# EAGLE board RimBoxPowerSupply (EAGLE 4.13)
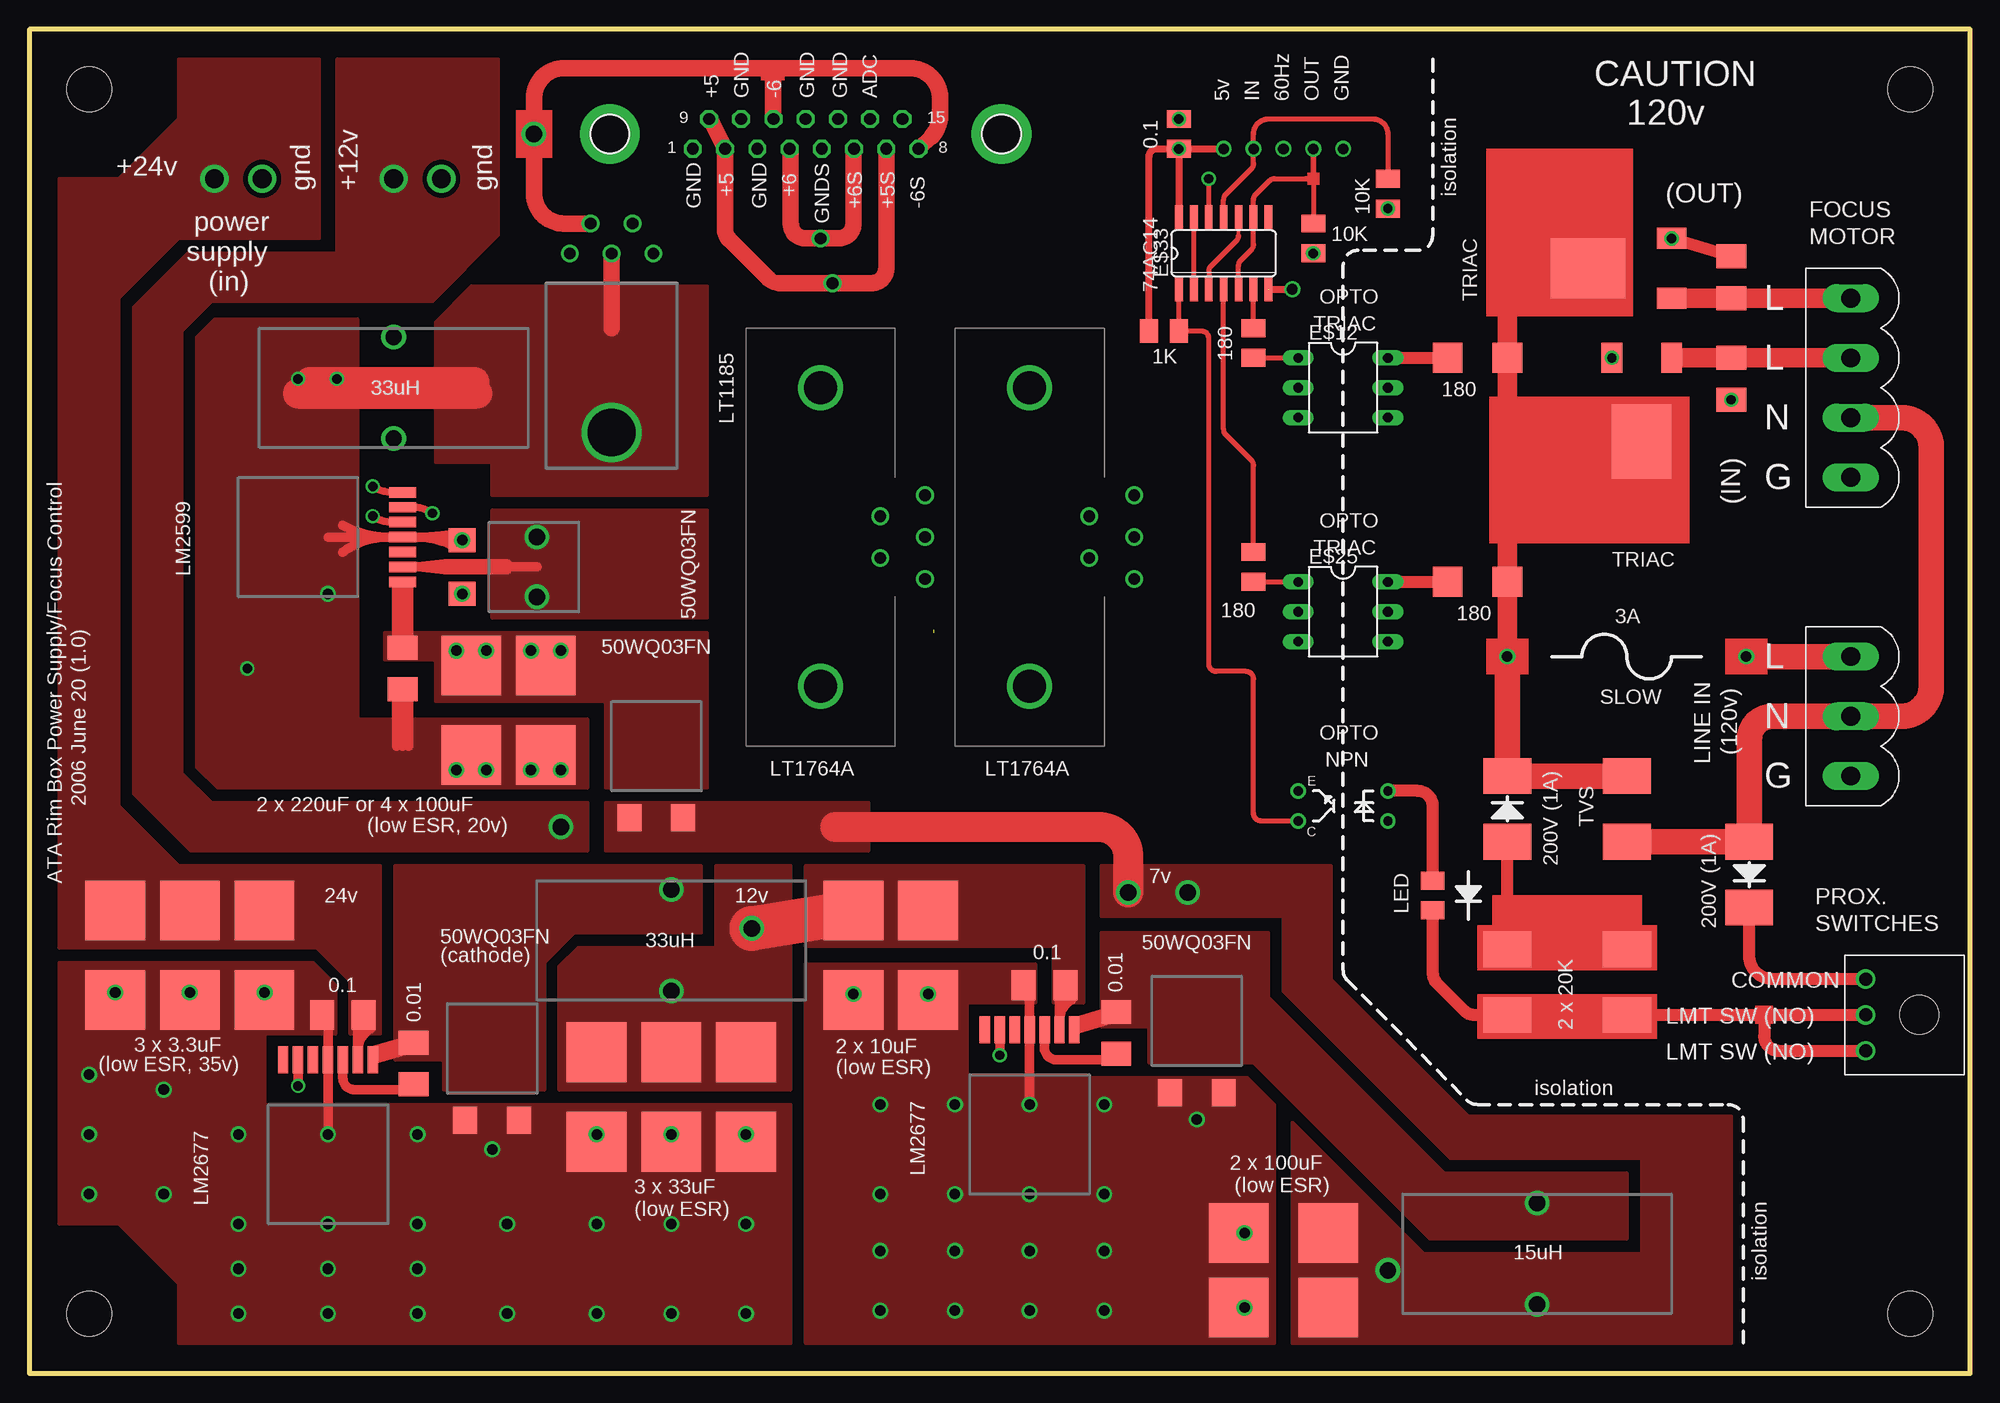
[diagram p0: board, top side]
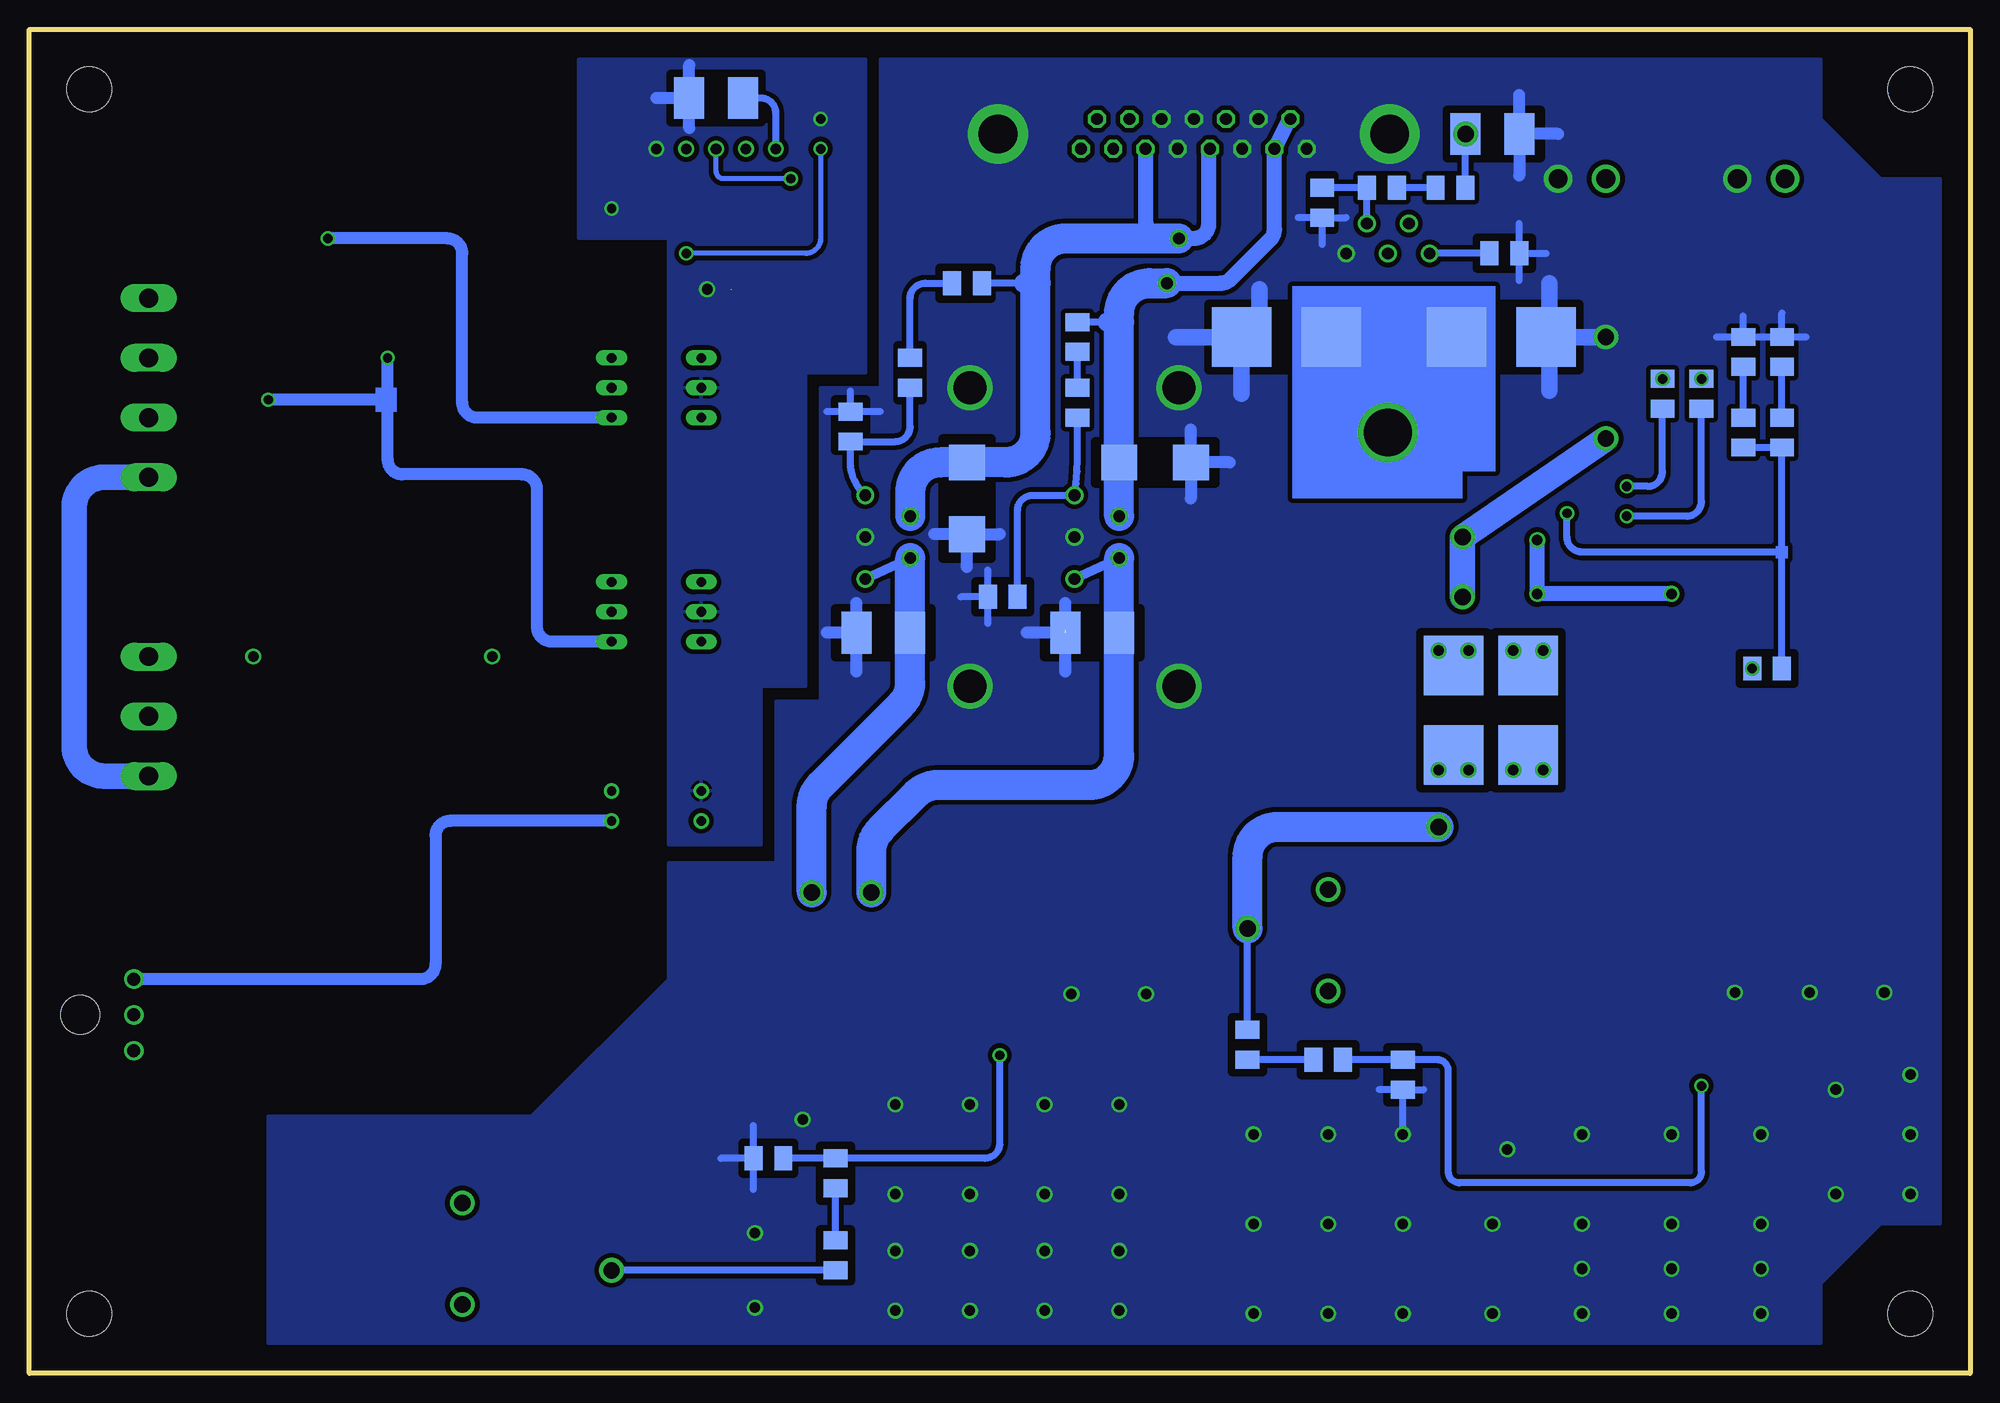
[diagram p1: board, bottom side, seen from below]

Size 165.1 x 114.3 mm. Coordinates in mm from the lower left corner, seen from the top.
Outline: 0,0 165.1,0 165.1,114.3 0,114.3 0,0
Copper layers (1*16): Top 0.035mm / dielectric 1.5mm / Bottom 0.035mm
Design rules "default": minimum track width 10mil, minimum drill 24mil, track to track 8mil, track to pad 8mil, pad to pad 8mil, via to via 8mil, smd to smd 8mil, copper to edge 40mil, drill to drill 8mil, minimum pad ring 10mil, minimum via ring 8mil, stop-mask expansion 4mil, vias tented up to drill 0mil, thermal gap 10mil
Holes 3.81 mm at 160.02,109.22 160.02,5.08 5.08,5.08 5.08,109.22
bRestrict: area 60.5,27.4 to 62.5,28.4; area 47,23.1 to 49.5,27.7; area 52.3,25.4 to 56.9,27.9; area 60.2,25.7 to 62.7,30.2; area 95.2,14.7 to 97.8,19.3; area 100.1,17 to 104.4,19.6; area 95.2,7.9 to 97.8,12.2; area 102.9,106.4 to 110.5,110.5; area 70.6,61 to 78.7,65; area 88.4,61 to 96.5,65; area 80,64.8 to 84.6,67.3; area 64.3,75.7 to 74.4,79.2; 22 more areas

## Footprints (pad centres in the part's own frame; a part is rotated, then mirrored left to right if it is on the bottom)
MOLEX398604PINHDR = drill 1.6 long: P$1 -2.54,0; P$2 -7.62,0; P$3 2.54,0; P$4 7.62,0
MOLEX398603PINHDR = drill 1.6 long: P$1 0,0; P$2 -5.08,0; P$3 5.08,0
MICROFIT1X3PIN = drill 1.1 round: P$1 0,4.572; P$2 -3.048,4.572; P$3 3.048,4.572 | hole 3.302: 0,0
SILICONDIODESMB = smd 4.064 x 3.048: P$1 0,2.794; P$2 0,-2.794
TWOPRONGPWRCONNECTOR = drill 1.6 round: P$1 -2.032,0; P$2 2.032,0
DPAKTRIAC = smd 5.08 x 6.35: P$1 0,4.572 | smd 1.778 x 2.54: P$2 -2.54,-2.54; P$3 2.54,-2.54
SMD1206 = smd 2.54 x 2.032: P$1 0,1.778; P$2 0,-1.778
RESISTORHALFWSMD = smd 2.54 x 2.54: P$1 -2.54,0; P$2 2.54,0
DIL06 = drill 0.813 long: 1 -2.54,-3.81; 2 0,-3.81; 3 2.54,-3.81; 4 2.54,3.81; 5 0,3.81; 6 -2.54,3.81
LM2677 = smd 0.889 x 2.286: P$1 0,6.35; P$2 -2.54,6.35; P$3 -1.27,6.35; P$4 -3.81,6.35; P$5 2.54,6.35; P$6 1.27,6.35; P$7 3.81,6.35
50WQ03FN = smd 2.032 x 2.286: P$1 -2.286,4.826; P$2 2.286,4.826
LARGETANTALUM = smd 5.08 x 5.08: P$1 0,3.81; P$2 0,-3.81
MEDIUMVERTINDUCTOR = drill 1.4 round: P$1 0,4.318; P$2 0,-4.318
SMD0805 = smd 2.032 x 1.524: P$1 0,1.27; P$2 0,-1.27
RESISTOR1WSMD = smd 4.064 x 3.048: P$1 0,2.794; P$2 0,-2.794
OPTOISOLATOR4PIN = drill 0.8 round: P$1 -3.81,1.27; P$2 -3.81,-1.27; P$3 3.81,1.27; P$4 3.81,-1.27
SO14 = smd 0.66 x 2.032: 1 -3.81,-3.073; 2 -2.54,-3.073; 3 -1.27,-3.073; 4 0,-3.073; 5 1.27,-3.073; 6 2.54,-3.073; 7 3.81,-3.073; 8 3.81,3.073; 9 2.54,3.073; 10 1.27,3.073; 11 0,3.073; 12 -1.27,3.073; 13 -2.54,3.073; 14 -3.81,3.073
D15 = drill 1.016 octagon: 1 -9.601,-1.27; 2 -6.858,-1.27; 3 -4.115,-1.27; 4 -1.372,-1.27; 5 1.372,-1.27; 6 4.115,-1.27; 7 6.858,-1.27; 8 9.601,-1.27; 9 -8.23,1.27; 10 -5.486,1.27; 11 -2.743,1.27; 12 0,1.27; 13 2.743,1.27; 14 5.486,1.27; 15 8.23,1.27 | drill 3.302 pad 5.08 round: G1 -16.662,0; G2 16.662,0
CAP10UFMIN = smd 2.54 x 3.556: P$1 -2.286,0; P$2 2.286,0
TO220WITHHEATSINK = drill 2.8 round: P$1 -12.7,0; P$2 12.7,0 | drill 1 round: P$3 0,8.89; P$4 3.556,8.89; P$5 -3.556,8.89; P$6 1.778,5.08; P$7 -1.778,5.08
LT1185 = drill 4.064 round: P$1 0,0 | drill 1 round: P$2 0,15.24; P$3 -3.556,15.24; P$4 3.556,15.24; P$5 -1.778,17.78; P$6 1.778,17.78
CAP10UF = smd 3.048 x 3.048: P$1 -3.048,0; P$2 3.048,0

## Placement (x,y rotation side)
E$1  [MOLEX398604PINHDR]  154.94,83.82 270 top
E$2  [MOLEX398603PINHDR]  154.94,55.88 90 top
E$3  [MICROFIT1X3PIN]  160.78,30.48 90 top
E$4  [SILICONDIODESMB]  146.3,42.42 0 top
E$5  [TWOPRONGPWRCONNECTOR]  17.78,101.6 0 top
E$6  [DPAKTRIAC]  137.16,93.98 90 top
E$7  [DPAKTRIAC]  137.16,83.82 180 top
E$8  [SMD1206]  144.78,93.22 0 top
E$9  [RESISTORHALFWSMD]  123.19,86.36 0 top
E$10  [SMD1206]  144.78,84.58 0 top
E$11  [RESISTORHALFWSMD]  123.19,67.31 0 top
E$12  [DIL06]  111.76,83.82 270 top
E$13  [LM2677]  25.4,20.32 0 top
E$14  [SMD1206]  32.7,26.35 0 top
E$15  [50WQ03FN]  39.37,26.35 180 top
E$16  [LARGETANTALUM]  48.26,23.5 0 top
E$17  [LARGETANTALUM]  54.61,23.5 0 top
E$18  [LARGETANTALUM]  60.96,23.5 0 top
E$19  [SMD1206]  26.67,30.48 90 top
E$20  [LARGETANTALUM]  20,35.56 0 top
E$21  [LARGETANTALUM]  13.65,35.56 0 top
E$22  [LARGETANTALUM]  7.3,35.56 0 top
E$23  [MEDIUMVERTINDUCTOR]  54.61,36.83 0 top
E$24  [SMD0805]  61.47,27.94 180 bottom
E$25  [DIL06]  111.76,64.77 270 top
E$26  [SMD0805]  48.26,25.4 180 bottom
E$27  [RESISTOR1WSMD]  135.89,33.27 0 top
E$28  [RESISTOR1WSMD]  135.89,48.01 0 top
E$29  [SILICONDIODESMB]  125.73,48.01 180 top
E$30  [OPTOISOLATOR4PIN]  111.76,48.26 180 top
E$31  [RESISTOR1WSMD]  125.73,33.27 0 top
E$32  [SMD0805]  119.38,40.64 180 top
E$33  [SO14]  101.6,95.25 0 top
E$34  [TWOPRONGPWRCONNECTOR]  33.02,101.6 0 top
E$35  [SMD0805]  104.14,87.63 180 top
E$36  [SMD0805]  97.79,105.41 180 top
E$37  [SMD0805]  104.14,68.58 180 top
E$38  [SMD0805]  96.52,88.65 90 top
E$39  [D15]  66.04,105.41 0 top
E$40  [LARGETANTALUM]  70.1,35.56 0 top
E$41  [LARGETANTALUM]  76.45,35.56 0 top
E$42  [CAP10UFMIN]  106.68,108.46 0 bottom
E$43  [LM2677]  85.09,22.86 0 top
E$44  [50WQ03FN]  99.31,28.7 180 top
E$45  [MEDIUMVERTINDUCTOR]  128.27,10.16 0 top
E$46  [LARGETANTALUM]  106.68,11.94 90 top
E$47  [LARGETANTALUM]  106.68,5.59 90 top
E$48  [SMD1206]  86.36,33.02 90 top
E$49  [SMD1206]  92.46,28.96 180 top
E$50  [SMD0805]  96.52,10.03 0 bottom
E$51  [SMD0805]  102.23,18.29 90 bottom
E$52  [SMD0805]  96.52,17.02 180 bottom
E$53  [MEDIUMVERTINDUCTOR]  30.99,83.82 0 top
E$54  [TO220WITHHEATSINK]  67.31,71.12 270 top
E$55  [TO220WITHHEATSINK]  85.09,71.12 270 top
E$56  [50WQ03FN]  53.34,52.07 180 top
E$57  [50WQ03FN]  41.66,68.58 90 top
E$58  [LARGETANTALUM]  43.94,56.39 0 top
E$59  [LARGETANTALUM]  37.59,56.39 0 top
E$60  [LARGETANTALUM]  39.88,88.14 90 bottom
E$61  [LM2677]  25.4,71.12 270 top
E$62  [LT1185]  49.53,80.01 0 top
E$63  [SMD1206]  31.75,59.94 180 top
E$64  [LARGETANTALUM]  58.17,88.14 270 bottom
E$65  [CAP10UFMIN]  40.64,105.41 180 bottom
E$66  [CAP10UFMIN]  92.46,62.99 0 bottom
E$67  [CAP10UFMIN]  74.68,62.99 0 bottom
E$68  [CAP10UF]  69.34,77.47 0 bottom
E$69  [CAP10UF]  85.34,74.42 270 bottom
E$70  [SMD0805]  95.25,80.52 0 bottom
E$71  [SMD0805]  90.17,85.09 0 bottom
E$72  [SMD0805]  85.34,92.71 270 bottom
E$73  [SMD0805]  82.3,66.04 270 bottom
E$74  [SMD0805]  75.95,82.55 0 bottom
E$75  [SMD0805]  75.95,88.14 0 bottom
E$76  [SMD0805]  50.04,100.84 270 bottom
E$77  [SMD0805]  55.12,99.57 180 bottom
E$78  [SMD0805]  44.2,100.84 90 bottom
E$79  [SMD0805]  26.16,83.31 0 bottom
E$80  [SMD0805]  22.86,83.31 0 bottom
E$81  [SMD0805]  19.3,86.87 0 bottom
E$82  [SMD0805]  16,86.87 0 bottom
E$83  [SMD0805]  19.3,80.01 0 bottom
E$84  [SMD0805]  16,80.01 0 bottom
E$85  [SMD0805]  17.27,59.94 270 bottom
E$86  [SMD0805]  109.22,96.52 0 top
E$87  [SMD0805]  115.57,100.33 0 top
E$88  [SMD0805]  39.62,95.25 270 bottom
E$89  [LARGETANTALUM]  37.59,56.39 0 bottom
E$90  [LARGETANTALUM]  43.94,56.39 0 bottom
E$107  [SMD0805]  54.61,26.67 270 bottom

## Library data of the parts
E$1-E$11 E$13-E$24 E$26-E$32 E$34-E$90 E$107 = rfa
E$12 E$25 = ic-package
E$33 = 74ac-logic

## Nets
DGND: E$12.2 E$25.2 E$30.P$4 E$33.7 E$42.P$1
GND: E$5.P$2 E$13.P$1 E$15.P$1 E$15.P$2 E$16.P$2 E$17.P$2 E$18.P$2 E$19.P$1 E$20.P$2 E$21.P$2 E$22.P$2 E$26.P$1 E$34.P$2 E$39.1 E$39.3 E$39.5 E$39.10 E$39.12 E$39.13 E$39.G1 E$39.G2 E$40.P$2 E$41.P$2 E$44.P$1 E$44.P$2 E$46.P$1 E$47.P$1 E$48.P$1 E$51.P$1 E$53.P$1 E$54.P$1 E$54.P$2 E$54.P$3 E$55.P$1 E$55.P$2 E$55.P$3 E$60.P$2 E$62.P$4 E$64.P$2 E$65.P$1 E$66.P$1 E$67.P$1 E$68.P$2 E$69.P$2 E$70.P$1 E$73.P$2 E$77.P$1 E$82.P$1 E$88.P$1
N7V: E$58.P$2 E$59.P$2 E$61.P$1 E$62.P$1 E$62.P$2 E$63.P$1
S$1: E$13.P$2 E$26.P$2 E$107.P$1
S$2: E$1.P$3 E$2.P$1
S$3: E$24.P$1 E$107.P$2
S$4: E$1.P$4 E$2.P$2
S$5: E$43.P$6
S$6: E$2.P$3
S$7: E$13.P$6
S$8: E$9.P$2 E$11.P$2
S$9: E$1.P$2 E$6.P$2 E$8.P$2
S$10: E$1.P$1 E$7.P$2 E$10.P$1
S$11: E$6.P$3 E$8.P$1 E$12.4
S$12: E$9.P$1 E$12.6
S$13: E$25.4
S$14: E$25.6
S$15: E$28.P$1 E$29.P$2
S$16: E$29.P$1 E$31.P$1
S$17: E$28.P$2
S$18: E$3.P$1 E$3.P$2 E$27.P$2
S$19: E$31.P$2 E$32.P$1
S$20: E$30.P$2 E$32.P$2
S$21: E$3.P$3 E$30.P$1
S$22: E$35.P$2
S$23: E$43.P$7 E$45.P$1 E$49.P$2
S$24: E$86.P$1
S$25: E$38.P$1 E$42.P$2
S$26: E$37.P$2
S$27: E$12.1 E$35.P$1
S$28: E$25.1 E$37.P$1
S$29: E$62.P$5 E$78.P$2
S$30: E$30.P$3 E$38.P$2
S$31: E$58.P$1 E$59.P$1 E$61.P$7 E$63.P$2
S$32: E$61.P$4 E$79.P$2
S$36: E$87.P$1
S$38: E$69.P$1 E$72.P$1
S$39: E$50.P$1 E$52.P$1
S$40: E$43.P$2 E$52.P$2
S$41: E$53.P$2 E$61.P$5
S$42: E$54.P$5 E$73.P$1 E$74.P$2
S$44: E$61.P$2 E$83.P$2 E$84.P$2 E$85.P$1
S$45: E$61.P$3 E$80.P$2
S$46: E$61.P$6
S$47: E$62.P$3 E$88.P$2
S$50: E$71.P$1 E$72.P$2
S$51: E$39.2 E$39.7 E$68.P$1 E$75.P$1
S$52: E$55.P$5 E$70.P$2 E$71.P$2
S$54: E$74.P$1 E$75.P$2
S$55: E$76.P$1 E$78.P$1
S$56: E$62.P$6 E$76.P$2 E$77.P$2
S$57: E$82.P$2 E$84.P$1
S$58: E$81.P$2 E$83.P$1
S$60: E$13.P$7 E$14.P$1 E$23.P$1
V7: E$45.P$2 E$46.P$2 E$47.P$2 E$50.P$2 E$54.P$4 E$55.P$4 E$56.P$1 E$56.P$2 E$66.P$2 E$67.P$2
V12PS: E$16.P$1 E$17.P$1 E$18.P$1 E$23.P$2 E$24.P$2 E$34.P$1 E$40.P$1 E$41.P$1 E$43.P$5 E$48.P$2
V24: E$5.P$1 E$13.P$5 E$19.P$2 E$20.P$1 E$21.P$1 E$22.P$1

## Tracks (layer width: path | path; a pad name or v marks a point on that pad's centre or on a via)
DGND  (via drill 0.8, 0.9)  (1 unrouted)
  Top 0.61: 105.41,92.2 v107.44,92.2
  Bottom 1.016: E$42.P$1 111.76,108.46 | E$42.P$1 108.97,111.25 | 108.97,105.92 E$42.P$1
  other vias: 97.79,106.68 111.76,104.14 115.57,99.06
  pour Bottom (isolate 0.406): 93.98,111.76 118.36,111.76 118.36,96.52 110.74,96.52 110.74,44.96 102.87,44.96 102.87,58.42 99.06,58.42 99.06,85.09 93.98,85.09
GND  (via drill 0.9)  (1 unrouted)
  Top 0.813: v25.4,20.32 25.4,25.4 | E$13.P$1 25.4,30.16 | v85.09,22.86 85.09,33.02
  Bottom 0.61: E$26.P$1 46.48,24.13 | E$26.P$1 50.29,24.13 | v48.26,20.32 E$26.P$1 | E$51.P$1 103.5,21.08 | E$51.P$1 106.3,18.29 | 103.5,15.62 E$51.P$1 | E$73.P$2 85.85,66.04 | E$73.P$2 83.57,68.33 | 83.57,63.75 E$73.P$2 | 92.71,81.79 E$70.P$1 | E$70.P$1 97.28,81.79 | E$70.P$1 95.25,83.57 | E$77.P$1 53.09,98.3 | E$77.P$1 57.15,98.3 | 55.12,96.01 E$77.P$1 | 13.97,88.14 E$82.P$1 | E$82.P$1 16,90.17 | E$82.P$1 19.3,88.14 | 19.3,88.14 21.59,88.14 | 19.3,88.14 19.3,89.92 | E$88.P$1 38.35,97.79 | E$88.P$1 36.07,95.25 | 38.35,92.96 E$88.P$1
  Bottom 1.016: 76.96,59.69 E$67.P$1 | 77.22,62.99 80.26,62.99 | 76.96,63.25 76.96,65.53 | 94.74,59.69 E$66.P$1 | E$66.P$1 97.28,62.99 | E$66.P$1 94.74,65.53 | E$68.P$2 66.29,80.26 | 62.99,77.47 E$68.P$2 | E$68.P$2 66.29,74.42 | E$69.P$2 88.14,71.37 | E$69.P$2 82.55,71.37 | 85.34,68.58 E$69.P$2 | 35.05,105.41 E$65.P$1 | E$65.P$1 38.35,108.71 | E$65.P$1 38.35,101.85 | E$64.P$2 61.98,89.92
  Bottom 1.422: E$53.P$1 E$60.P$2 | 35.81,83.57 35.81,92.71 | 60.45,88.14 60.45,92.2 | 61.98,83.31 E$64.P$2 67.56,88.14
  other vias: 5.08,15.24 17.78,5.08 11.43,15.24 5.08,20.32 5.08,25.4 17.78,12.7 25.4,5.08 11.43,24.13 7.3,32.38 25.4,12.7 17.78,20.32 33.02,5.08 13.65,32.38 33.02,12.7 40.64,5.08 20,32.38 33.02,20.32 40.64,12.7 48.26,5.08 39.37,19.05 54.61,5.08 48.26,12.7 54.61,12.7 60.96,5.08 54.61,20.32 60.96,12.7 60.96,20.32 17.78,8.89 25.4,8.89 33.02,8.89 76.45,32.26 70.1,32.26 103.38,11.94 103.38,5.59 72.39,22.86 78.74,22.86 91.44,22.86 99.31,21.59 72.39,15.24 78.74,15.24 85.09,15.24 91.44,15.24 72.39,10.41 78.74,10.41 85.09,10.41 91.44,10.41 72.39,5.33 78.74,5.33 85.09,5.33 91.44,5.33
  pour Bottom (isolate 0.406, no thermals): 2.54,101.6 7.62,101.6 12.7,106.68 12.7,111.76 92.71,111.76 92.71,83.82 97.79,83.82 97.79,57.15 101.6,57.15 101.6,43.43 110.74,43.43 110.74,33.53 122.43,21.84 144.78,21.84 144.78,2.54 12.7,2.54 12.7,7.62 7.62,12.7 2.54,12.7
  pour Top (isolate 0.406, no thermals): 2.54,34.92 24.13,34.92 26.04,33.02 26.04,28.89 20,28.89 20,22.86 64.77,22.86 64.77,2.54 12.7,2.54 12.7,7.62 7.62,12.7 2.54,12.7
  pour Top (isolate 0.406, no thermals): 66.04,34.8 85.6,34.8 85.6,31.5 79.76,31.5 79.76,25.15 103.63,25.15 105.92,22.86 105.92,2.54 66.04,2.54
N7V  (via drill 0.8, 0.9)
  Top 0.813: 31.24,53.34 31.24,58.17 | 31.75,53.34 E$63.P$1 | 32.26,53.34 32.26,58.42 | 33.02,71.12 36.83,71.12 | 33.02,71.12 arc10 36.07,71.37 | 33.02,71.12 arc-28 36.07,70.36 | 33.02,71.12 E$61.P$1 30.48,71.12 | 30.48,71.12 25.4,71.12 | 30.48,71.12 arc-30 26.67,72.14 | 26.67,69.85 arc-37 30.48,71.12
  Top 1.422: 49.53,88.9 E$62.P$2
  Top 2.54: 22.86,83.31 38.1,83.31 | 23.88,84.33 37.85,84.33
  Bottom 1.27: v36.83,70.87 v36.83,66.29 v25.4,66.29
  other vias: 18.54,59.94 22.86,84.58 26.16,84.58
  pour Top (isolate 0.406, no thermals): 27.94,89.66 27.94,55.63 47.5,55.63 47.5,49.78 16,49.78 14.22,51.56 14.22,88.14 15.75,89.66
  pour Top (isolate 0.406, no thermals): 57.66,92.46 57.66,74.68 39.37,74.68 39.37,77.47 34.54,77.47 34.54,89.41 37.59,92.46
S$1  (via drill 0.8)
  Top 0.813: v22.86,24.45 E$13.P$2
  Bottom 0.61: v22.86,24.45 22.86,17.14 arc90 23.81,16.19 43.43,16.19 arc90 44.39,17.14 44.39,25.72 arc-90 45.34,26.67 E$26.P$2 E$107.P$1
S$2
  Top 2.184: E$1.P$3 159.26,81.28 arc-90 161.8,78.74 161.8,58.42 arc-90 159.26,55.88 E$2.P$1 148.3,55.88 arc90 146.3,53.88 146.3,45.47
S$3
  Bottom 0.61: E$107.P$2 E$24.P$1
S$4
  Bottom 2.184: E$1.P$4 158.75,76.2 arc-90 161.29,73.66 161.29,53.34 arc-90 158.75,50.8 E$2.P$2
S$5
  Top 0.813: E$43.P$6 86.36,27.67 arc90 87.36,26.67 92.46,26.67
S$6  (via drill 0.9)
  Top 2.184: v146.05,60.96 E$2.P$3
S$7
  Top 0.813: E$13.P$6 26.67,25.08 arc90 27.62,24.13 32.7,24.13
S$8  (via drill 0.9)
  Top 1.676: 125.73,97.28 E$9.P$2 E$11.P$2 v125.73,60.96
  Top 2.184: 125.73,51.05 v125.73,60.96
S$9
  Top 1.676: E$6.P$2 E$8.P$2 E$1.P$2
S$10
  Top 1.676: E$7.P$2 E$10.P$1 E$1.P$1
S$11  (via drill 0.8)
  Top 1.016: E$6.P$3 E$8.P$1
  Bottom 1.016: E$6.P$3 129.54,96.52 arc90 128.27,95.25 128.27,82.55 arc-90 127,81.28 E$12.4
  other vias: 139.7,96.52
S$12
  Top 1.016: E$12.6 E$9.P$1
S$13  (via drill 0.8)
  Bottom 1.016: E$25.4 120.65,62.23 arc90 121.92,63.5 121.92,75.18 arc-90 123.19,76.45 133.35,76.45 arc90 134.62,77.72 134.62,82.8 | 134.62,82.8 v134.62,86.36 | 134.62,82.8 v144.78,82.8
S$14
  Top 1.016: E$25.6 120.4,67.31
S$15
  Top 2.184: E$29.P$2 E$28.P$1
S$16
  Top 1.016: E$31.P$1 E$29.P$1
S$17
  Top 2.184: E$28.P$2 146.3,45.21
S$18
  Top 1.016: E$27.P$2 147.57,30.48 | 147.57,30.48 E$3.P$1 | E$3.P$2 148.84,27.43 arc-90 147.57,28.7 147.57,30.48
S$19
  Top 1.016: E$31.P$2 122.95,30.48 arc-45 122.06,30.85 119.75,33.16 arc-45 119.38,34.05 E$32.P$1
S$20
  Top 1.016: E$30.P$2 118.11,49.53 arc-90 119.38,48.26 E$32.P$2
S$21
  Top 1.016: 146.3,39.62 146.3,35.53 arc90 148.3,33.53 E$3.P$3
  Bottom 1.016: E$30.P$1 129.29,46.99 arc-90 130.56,45.72 130.56,34.8 arc90 131.83,33.53 E$3.P$3
S$22
  Top 0.406: E$35.P$2 104.14,92.2
S$23
  Top 0.813: E$43.P$7 91.95,30.1 | 88.9,29.84 91.82,30.73
  pour Top (isolate 0.406, no thermals): 91.19,37.47 105.41,37.47 105.41,32 120.4,17.02 135.89,17.02 135.89,11.43 119.13,11.43 104.14,26.42 95.25,26.42 95.25,29.46 91.19,29.46
S$24  (via drill 0.9)
  Top 0.406: 102.87,92.2 102.87,94.22 arc-45 103.06,94.67 103.95,95.57 arc45 104.14,96.02 104.14,99.81 arc-45 104.33,100.26 105.48,101.41 arc-45 105.93,101.6 108.58,101.6 arc90 109.22,102.23 v109.22,104.14 E$86.P$1
S$25  (via drill 0.8, 0.9)
  Top 0.61: E$38.P$1 95.25,103.5 arc-90 95.89,104.14 v97.79,104.14 | v97.79,104.14 v101.6,104.14 | v97.79,104.14 97.79,98.3 | v97.79,104.14 97.79,104.39
  Bottom 0.406: v97.79,104.14 97.79,96.52 arc90 99.06,95.25 v109.22,95.25
  Bottom 0.61: E$42.P$2 102.87,108.46 arc90 101.6,107.19 v101.6,104.14
S$26
  Top 0.406: 101.6,91.95 101.6,80.27 arc45 101.79,79.82 103.95,77.66 arc-45 104.14,77.21 E$37.P$2
S$27
  Top 0.406: E$35.P$1 E$12.1
S$28
  Top 0.406: E$37.P$1 E$25.1
S$29  (via drill 1.4)
  Top 1.27: 76.73,105.17 75.69,104.14
  Top 1.422: E$62.P$5 45.47,97.79 arc-90 42.93,100.33 v42.93,105.41 42.93,108.46 arc-90 45.47,111 63.25,111 | 63.25,111 74.93,111 arc-90 77.47,108.46 77.47,106.97 arc-45 76.73,105.17 | 63.25,111 63.25,106.68
  Bottom 0.61: E$78.P$2 v42.93,105.41
S$30
  Top 0.406: 97.79,92.2 E$38.P$2 99.69,88.65 arc-90 100.33,88.01 100.33,60.33 arc90 100.97,59.69 103.5,59.69 arc-90 104.14,59.05 104.14,47.62 arc90 104.78,46.99 E$30.P$3
S$31
  Top 0.813: E$63.P$2 E$61.P$7 | 31.24,61.72 31.24,67.31 | 32.26,61.72 32.26,67.31
  pour Top (isolate 0.406, no thermals): 57.66,49.78 57.66,62.99 30.23,62.99 30.23,60.71 34.54,60.71 34.54,57.15 49.02,57.15 49.02,49.78
S$32  (via drill 0.8)
  Top 0.61: E$61.P$4 30.99,74.93 arc-32 v29.21,75.44
  Bottom 0.61: v29.21,75.44 27.43,75.44 arc-90 26.16,76.71 E$79.P$2
S$33
  Top 0.406: 99.06,92.2 99.06,98.3
S$34
  Bottom 0.61: 73.41,88.9 arc180 73.41,89.92
S$35
  Top 0.305: 102.87,96.78 102.87,98.3
  Top 0.406: 102.87,96.78 arc-45 102.68,96.33 100.52,94.17 arc45 100.33,93.72 100.33,92.2
S$36  (via drill 0.9)
  Top 0.406: 101.6,98.3 101.6,99.81 arc-45 101.79,100.26 103.95,102.43 arc45 104.14,102.88 v104.14,104.14 104.14,105.41 arc-90 105.41,106.68 114.3,106.68 arc-90 115.57,105.41 E$87.P$1
S$37  (via drill 0.8, 0.9)
  Top 0.406: 100.33,98.3 v100.33,101.6
  Bottom 0.406: v100.33,101.6 106.05,101.6 arc90 106.68,102.23 v106.68,104.14
S$38  (via drill 1)
  Top 1.422: 70.1,104.14 70.1,97.79 arc-90 68.83,96.52 v67.31,96.52 66.04,96.52 arc-90 64.77,97.79 64.77,104.14
  Bottom 0.61: 79.5,92.71 E$72.P$1
  Bottom 1.27: 64.77,104.14 64.77,97.79 arc90 66.04,96.52 v67.31,96.52 68.83,96.52 arc90 70.1,97.79 70.1,104.14
  Bottom 2.54: 90.17,72.9 90.17,74.93 arc90 87.63,77.47 E$69.P$1 82.04,77.47 arc-90 79.5,80.01 79.5,92.71 79.5,93.98 arc90 76.96,96.52 v67.31,96.52
S$39
  Bottom 0.61: E$50.P$1 E$52.P$1
S$40  (via drill 0.8)
  Top 0.813: v82.55,27.05 E$43.P$2
  Bottom 0.61: 100.84,18.29 E$52.P$2 83.82,18.29 arc-90 82.55,19.56 v82.55,27.05
S$41  (via drill 1.4)
  Top 0.813: 40.64,68.33 35.31,68.33 33.02,68.58 | 40.64,68.83 35.31,68.83 33.02,68.58 | 33.02,68.58 43.18,68.58 | E$61.P$5 33.02,68.58
  Bottom 2.184: E$53.P$2 v43.18,71.12 v43.18,66.04
  pour Top (isolate 0.406, no thermals): 39.37,64.26 57.66,64.26 57.66,67.82 57.66,73.41 43.43,73.41 39.37,73.41
S$42
  Bottom 0.61: E$74.P$2 75.95,77.72 arc10 E$54.P$5 79.76,74.68 arc-90 81.03,73.41 E$73.P$1
S$43  (via drill 0.9)
  other vias: 36.32,61.47
S$44  (via drill 0.8)
  Top 0.61: E$61.P$2 32.51,73.66 arc-37 v34.29,73.15
  Bottom 0.61: E$83.P$2 E$84.P$2 16,69.85 | E$85.P$1 16,69.85 | v34.29,73.15 34.29,71.12 arc-90 33.02,69.85 16,69.85
S$45  (via drill 0.8)
  Top 0.61: E$61.P$3 30.99,72.39 arc-32 v29.21,72.9
  Bottom 0.61: v29.21,72.9 24.13,72.9 arc-90 22.86,74.17 E$80.P$2
S$46
  Top 0.61: E$61.P$6 30.99,69.85
S$47
  Bottom 0.61: E$88.P$2 E$62.P$3
S$48  (via drill 0.9)
  other vias: 38.86,61.47
S$49
  Bottom 0.61: 80.52,92.2 arc180 80.52,93.22
S$50
  Bottom 0.61: E$72.P$2 88.9,92.71 arc-90 90.17,91.44 E$71.P$1
S$51  (via drill 1)
  Top 1.27: 63.77,92.71 arc-45 62.87,93.08
  Top 1.422: 57.91,106.68 E$39.2 59.18,97.3 arc45 59.55,96.4 62.87,93.08 | 63.77,92.71 v68.33,92.71 71.63,92.71 arc90 72.9,93.98 E$39.7
  Bottom 0.61: 72.39,89.41 E$75.P$1
  Bottom 1.27: 57.91,106.68 E$39.2 59.18,97.3 arc45 59.55,96.4 62.87,93.08 arc45 63.77,92.71 v68.33,92.71
  Bottom 2.54: 72.39,72.9 E$68.P$1 72.39,89.41 72.39,90.17 arc90 69.85,92.71 v68.33,92.71
S$52
  Bottom 0.61: E$71.P$2 90.17,80.52 arc90 91.44,79.25 E$70.P$2 95.25,77.47 arc-49 E$55.P$5
S$53  (via drill 0.9)
  other vias: 42.67,61.47
S$54
  Bottom 0.61: E$74.P$1 E$75.P$2
S$55
  Bottom 0.61: E$78.P$1 E$76.P$1
S$56
  Bottom 0.61: E$62.P$6 E$76.P$2 E$77.P$2
S$57
  Bottom 0.61: E$84.P$1 E$82.P$2
S$58
  Bottom 0.61: E$83.P$1 E$81.P$2
S$59  (via drill 0.9)
  other vias: 45.21,61.47
S$60
  Top 0.813: E$13.P$7 32.77,27.69 | 29.21,27.43 32.77,28.45
  pour Top (isolate 0.406, no thermals): 43.81,24.13 35.24,24.13 35.24,26.67 31.11,26.67 31.11,43.18 57.15,43.18 57.15,37.47 46.35,37.47 43.81,34.92
S$61  (via drill 0.9)
  other vias: 36.32,51.31
S$62  (via drill 0.9)
  other vias: 38.86,51.31
S$63  (via drill 0.9)
  other vias: 42.67,51.31
S$64  (via drill 0.9)
  other vias: 45.21,51.31
V7  (via drill 1.4)
  Top 2.54: v93.47,40.89 93.47,43.94 arc90 90.93,46.48 68.58,46.48
  Bottom 0.61: E$50.P$2 v115.57,8.76
  Bottom 0.813: 72.39,69.34 E$54.P$4 | 90.17,69.34 E$55.P$4
  Bottom 2.54: 72.39,69.34 E$67.P$2 72.39,52.58 arc90 74.93,50.04 87.85,50.04 arc-45 89.64,49.29 92.73,46.21 arc-45 93.47,44.41 v93.47,40.89 | 90.17,69.34 E$66.P$2 90.17,58.71 arc45 90.91,56.91 97.81,50.02 arc-45 98.55,48.22 v98.55,40.89
  pour Top (isolate 0.406, no thermals): 91.19,43.18 110.74,43.18 110.74,33.53 122.43,21.84 144.78,21.84 144.78,2.54 107.44,2.54 107.44,21.34 118.62,10.16 137.16,10.16 137.16,18.29 120.9,18.29 106.68,32.51 106.68,38.86 91.19,38.86
  pour Top (isolate 0.406, no thermals): 49.02,48.51 71.37,48.51 71.37,45.97 71.37,44.45 51.56,44.45 49.02,44.45
V12PS  (via drill 1.4)
  Top 0.813: 87.63,29.97 87.63,33.02 | 87.63,29.97 arc-59 88.65,31.75 | E$43.P$5 87.63,29.97
  Top 3.81: v61.47,37.85 70.1,39.24
  Bottom 0.61: E$24.P$2 v61.47,37.85
  Bottom 2.54: v61.47,37.85 61.47,43.94 arc90 58.93,46.48 v45.21,46.48
  pour Top (isolate 0.406, no thermals): 58.42,43.18 64.77,43.18 64.77,24.13 45.09,24.13 45.09,34.61 46.67,36.2 58.42,36.2
  pour Top (isolate 0.406, no thermals): 66.04,43.18 89.66,43.18 89.66,31.5 87.12,31.5 87.12,36.32 66.04,36.32
  pour Top (isolate 0.406, no thermals): 26.16,111.76 26.16,95.25 13.46,95.25 8.89,90.68 8.89,49.28 13.72,44.45 47.5,44.45 47.5,48.51 15.49,48.51 12.95,51.05 12.95,88.65 15.49,91.19 34.29,91.19 39.88,96.77 39.88,111.76
V24
  Top 0.813: 27.94,27.56 27.94,30.16 | E$13.P$5 27.94,27.56 | 27.94,27.56 arc-56 29.08,29.34
  pour Top (isolate 0.406, no thermals): 12.7,111.76 24.64,111.76 24.64,96.52 12.7,96.52 7.62,91.44 7.62,48.26 12.7,43.18 29.84,43.18 29.84,28.89 27.3,28.89 27.3,33.34 24.45,36.2 2.54,36.2 2.54,101.6 7.62,101.6 12.7,106.68
(copper drawn outside any net)
  shapes: Bottom area x4, Top area x11

## Text on the board
tPlace: CAUTION | +5 | GND | -6 | GND | GND | ADC | 5v | IN | 60Hz | OUT | GND | 120v | 0.1 | +24v | gnd | +12v | gnd | +5 | +6 | isolation | (OUT) | GND | GND | +6S | +5S | -6S | 10K | GNDS | FOCUS | power | 10K | MOTOR | supply | (in) | 74AC14 | OPTO | TRIAC | L | TRIAC | 1K | 180 | L | 33uH | 180 | LT1185 | N | G | (IN) | OPTO | TRIAC | TRIAC | LM2599 | 50WQ03FN | 180 | 180 | 3A | 50WQ03FN | L | SLOW | N | OPTO | (120v) | NPN | LINE IN | LT1764A | LT1764A | G | 2006 June 20 (1.0) | 2 x 220uF or 4 x 100uF | (low ESR, 20v) | TVS | 200V (1A) | ATA Rim Box Power Supply/Focus Control | 7v | 24v | 12v | PROX. | LED | 200V (1A) | SWITCHES | 50WQ03FN | 33uH | 50WQ03FN | (cathode) | 0.1 | COMMON | 0.1 | 0.01 | 0.01 | LMT SW (NO) | 2 x 20K | 3 x 3.3uF | 2 x 10uF | LMT SW (NO) | (low ESR, 35v) | (low ESR) | isolation | LM2677 | 2 x 100uF | 3 x 33uF | (low ESR) | LM2677 | (low ESR) | 15uH | isolation